# Altium PCB MacroUzaz_PCB.PcbDoc
Units mm, origin at the board's own origin, x right, y up, seen from the top; angles counter-clockwise.
Board outline 70.01 x 100.01 mm, 2 copper layers (Top Layer, Bottom Layer), stack 1.571 mm thick; 21 components, 25 nets, 105 pads, 2 vias.
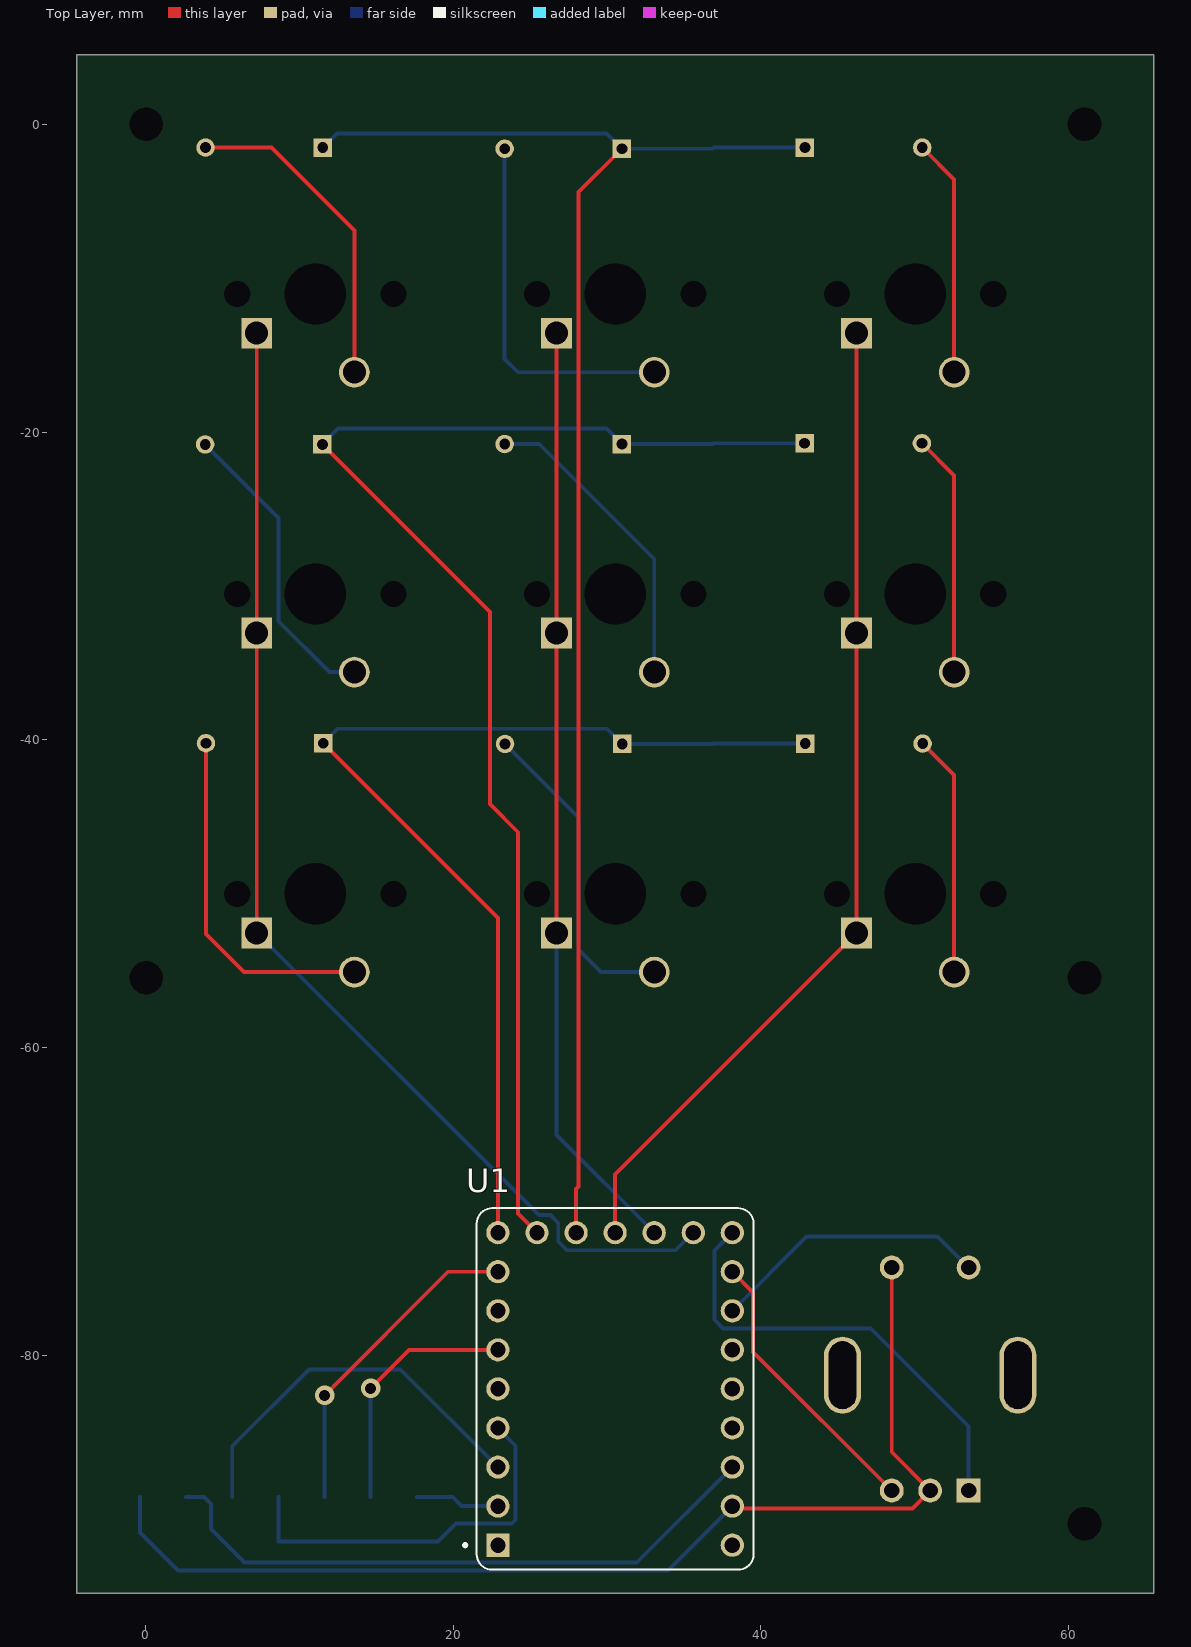
[diagram p0: Top Layer view]
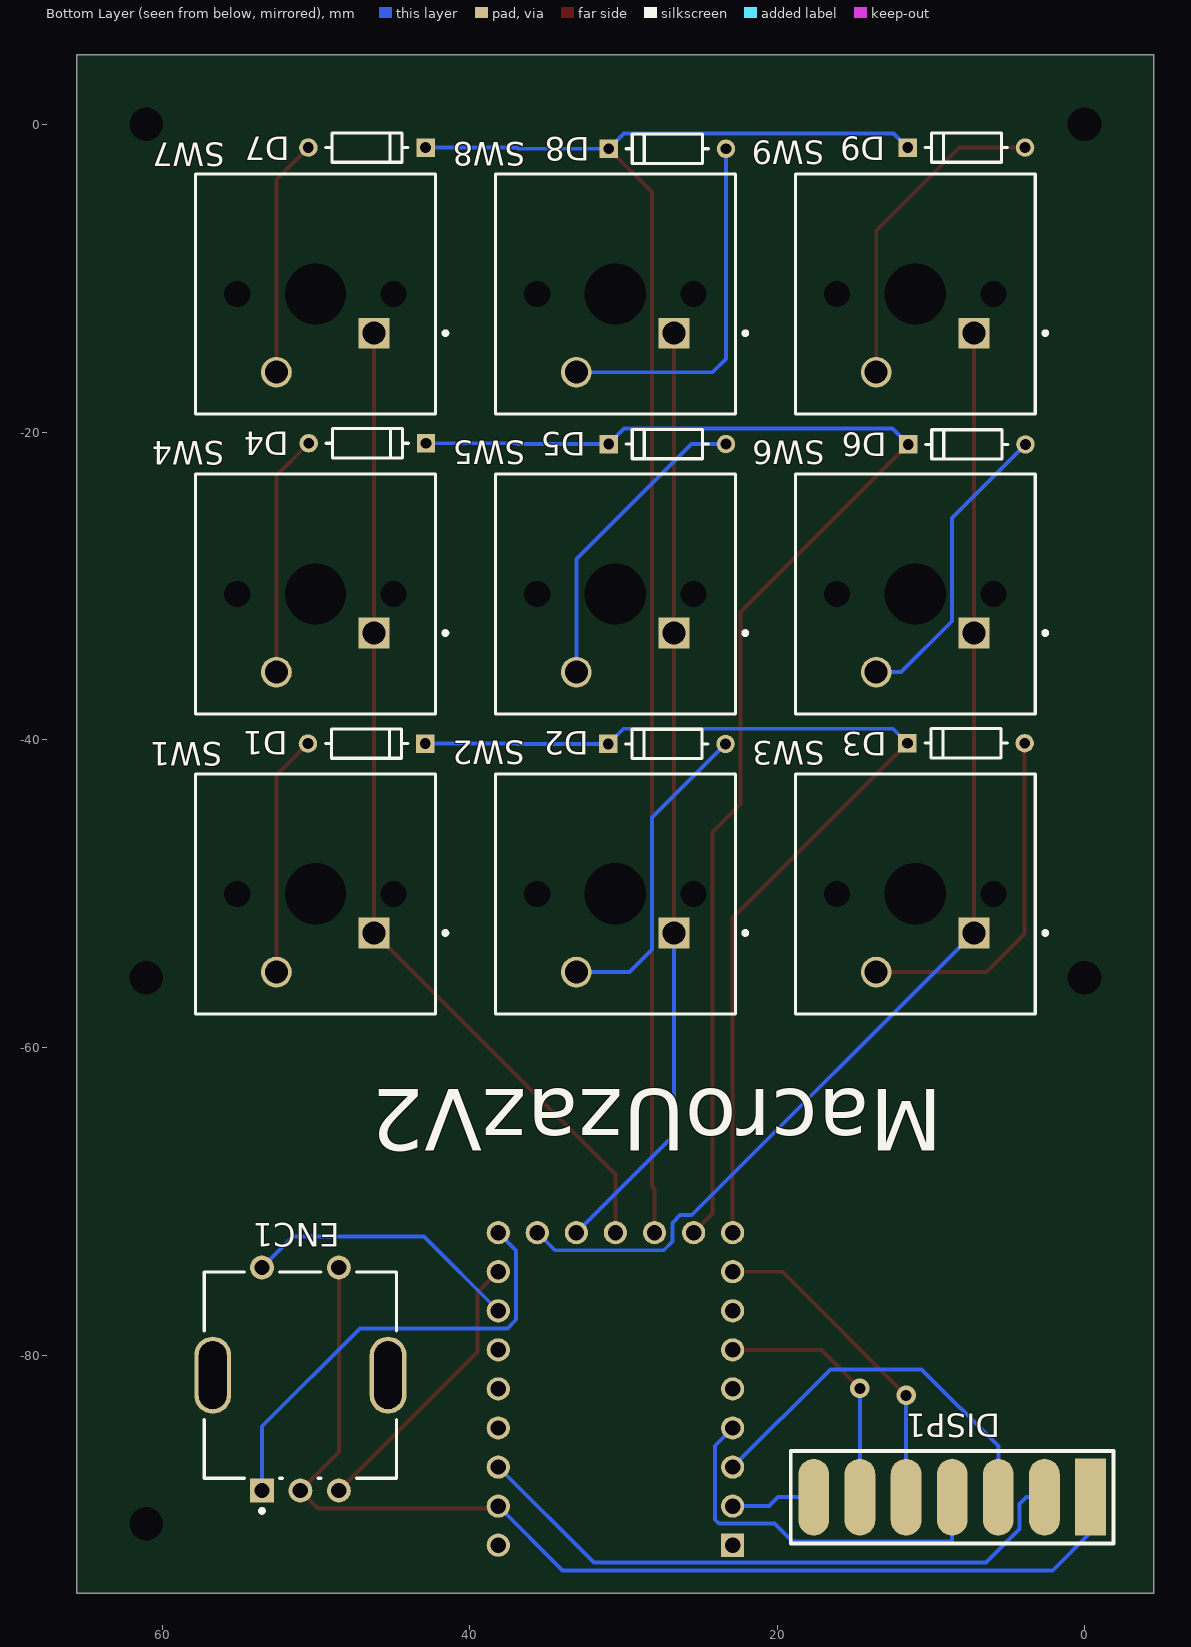
[diagram p1: Bottom Layer view, seen from below]
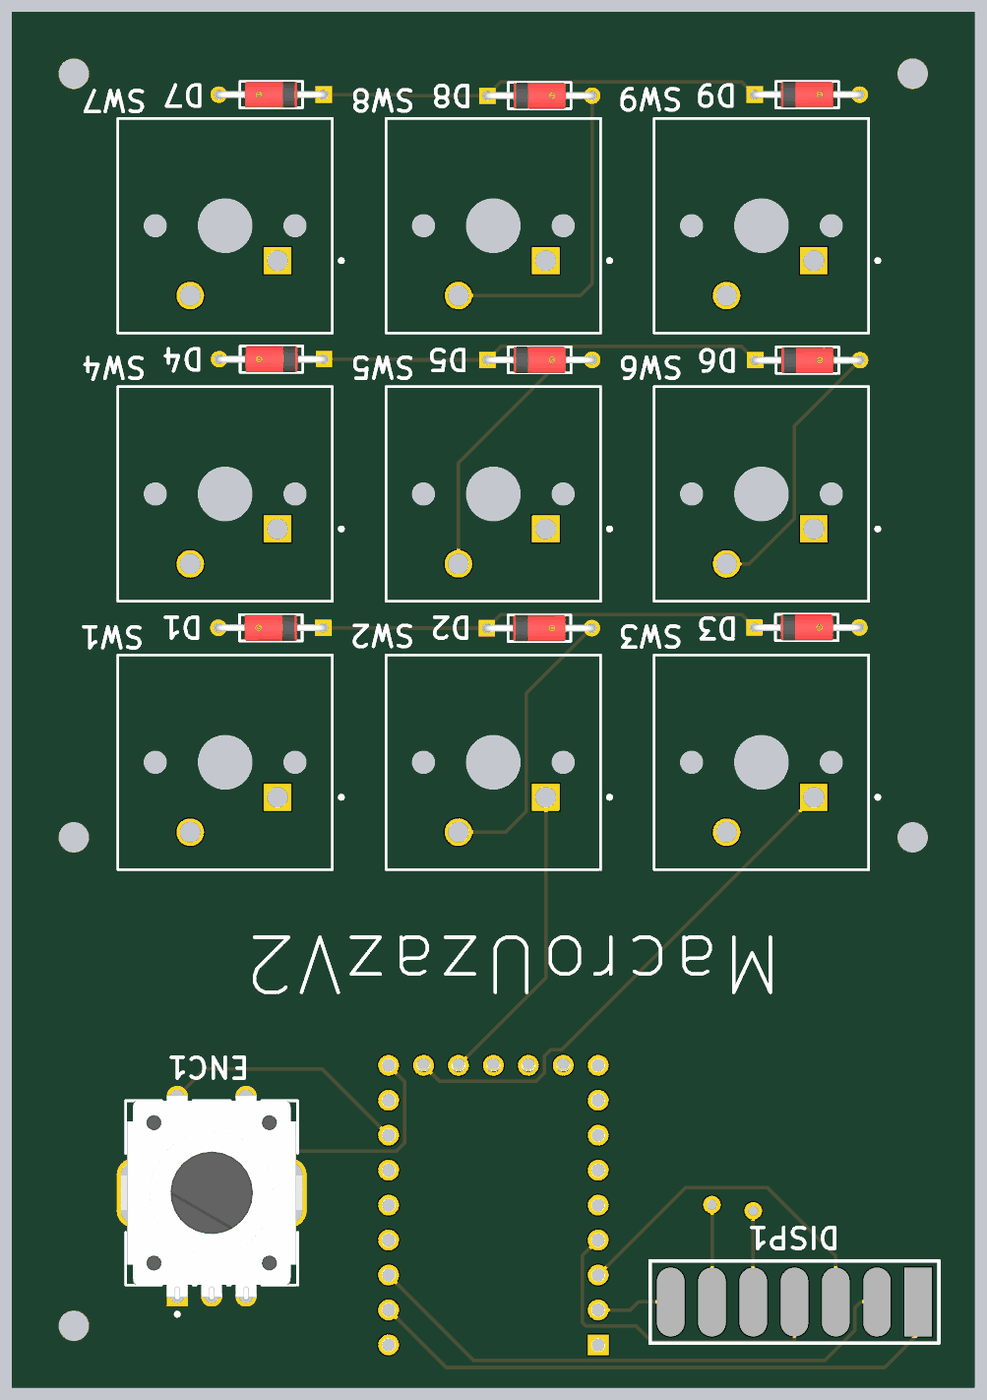
[diagram p2: 3D render of the assembled board from below, using the file's embedded part models]

## Layer stack, top to bottom
Top Solder: solder mask 0.0102, Solder Resist, Dk 3.5
Top Layer: signal copper 0.0356
Dielectric 1: dielectric 1.5, FR-4, Dk 4.8
Bottom Layer: signal copper 0.0356
Bottom Solder: solder mask 0.0102, Solder Resist, Dk 3.5

## Board outline
-4.466,-95.479 65.534,-95.479 65.541,-95.472 65.541,4.528 65.534,4.534 -4.466,4.534 -4.473,4.528

## Design rules (kind name [scope] priority, off if disabled: settings)
Clearance [All] p1: gap=0.254 ignorepadtopadclearanceinfootprint=FALSE
HoleSize [All] p1: absolutevalues=TRUE maxlimit=4.5 minlimit=0.025 maxpercent=80.000 minpercent=20.000
PolygonConnect [All] p1: connectstyle=Relief reliefconductorwidth=0.254 reliefentries=4 polygonreliefangle="90 Angle" airgapwidth=0.254
RoutingVias [All] p1: holewidth=0.711 width=1.27 viastyle="Through Hole" minholewidth=0.711 minwidth=1.27 maxholewidth=0.711 maxwidth=1.27
SolderMaskExpansion [All] p1: expansion=0.102 istentingtop=FALSE
SupplyNets "Schematic Supply Nets_1" [InNet('VCC')] p1: voltage=0.000
SupplyNets "Schematic Supply Nets" [InNet('GND')] p2: voltage=0.000
Width [All] p1: maxlimit=0.254 minlimit=0.254 preferedwidth=0.254
29 further rules are at their usual default settings.

## Components (designator, comment, footprint, x,y, rotation, side; value= is the part's Value field where it differs from the comment)
D1 "1N4148" FP-017AG-MFG 46.704,-40.243 r0 bottom locked
D2 "1N4148" FP-017AG-MFG 27.179,-40.268 r180 bottom locked
D3 "1N4148" FP-017AG-MFG 7.729,-40.218 r180 bottom locked
D4 "1N4148" FP-017AG-MFG 46.654,-20.718 r0 bottom locked
D5 "1N4148" FP-017AG-MFG 27.154,-20.768 r180 bottom
D6 "1N4148" FP-017AG-MFG 7.679,-20.793 r180 bottom locked
D7 "1N4148" FP-017AG-MFG 46.679,-1.493 r0 bottom locked
D8 "1N4148" FP-017AG-MFG 27.154,-1.568 r180 bottom locked
D9 "1N4148" FP-017AG-MFG 7.704,-1.493 r180 bottom locked
DISP1 "1.3\" OLED Display" OLED_Display -0.371,-89.243 r0 top locked
ENC1 "PEC11R-4215F-S0024" FP-PEC11R-4215F-S0024-MFG 51.008,-81.31 r180 bottom locked
SW1 "MX1A-11NW" CHRY-MX1A-11NW_V 50.029,-50.018 r0 bottom locked
SW2 "MX1A-11NW" CHRY-MX1A-11NW_V 30.529,-50.018 r0 bottom locked
SW3 "MX1A-11NW" CHRY-MX1A-11NW_V 11.029,-50.018 r0 bottom locked
SW4 "MX1A-11NW" CHRY-MX1A-11NW_V 50.029,-30.518 r0 bottom locked
SW5 "MX1A-11NW" CHRY-MX1A-11NW_V 30.529,-30.518 r0 bottom locked
SW6 "MX1A-11NW" CHRY-MX1A-11NW_V 11.029,-30.518 r0 bottom locked
SW7 "MX1A-11NW" CHRY-MX1A-11NW_V 50.029,-11.018 r0 bottom locked
SW8 "MX1A-11NW" CHRY-MX1A-11NW_V 30.529,-11.018 r0 bottom locked
SW9 "MX1A-11NW" CHRY-MX1A-11NW_V 11.029,-11.018 r0 bottom locked
U1 "RP2040-ZERO" MODULE_RP2040-ZERO 30.524,-82.203 r180 top locked

## Footprints (in the part's own frame and the unit in brackets; to place one, negate y for a bottom-side part, rotate by r counter-clockwise, add the part's x,y. Pads: shape width x height; smd on the part's side, far side on the other; paste and mask are expansions set on the pad)
CHRY-MX1A-11NW_V [mm] "THD, 2-Leads, Body 15.6x15.6mm"
  rect 2x2 hole 1.499 paste-2539.97: 1(-3.81,2.54)
  round 2 hole 1.499 paste-2539.97: 2(2.54,5.08)
  round 0 hole 3.988 unplated paste-2539.97: MH1(0,0)
  round 0 hole 1.702 unplated paste-2539.97: MH2(-5.08,0) MH3(5.08,0)
  silkscreen extent -8.57,-7.8 7.8,7.8, body extent -7.8,-7.8 7.8,7.8, height 15.2
FP-017AG-MFG [mm]
  rect 1.2x1.2 hole 0.7 paste-2539.97 mask+0: 1(-3.813,0)
  round 1.2 hole 0.7 paste-2539.97 mask+0: 2(3.813,0)
  silkscreen extent -2.68,-0.95 2.68,0.95, body extent -4.06,-0.95 4.06,0.95, height 1.91
FP-PEC11R-4215F-S0024-MFG [mm]
  round 1.55 hole 1 paste-2539.97 mask+0: 1(-2.5,7) 2(2.5,7) B(2.5,-7.5) C(0,-7.5)
  rrect100% 2.4x5 hole 4.4 slot 1.8 at 0 deg paste-2539.97 mask+0: 3(-5.7,0) 4(5.7,0)
  rect 1.55x1.55 hole 1 paste-2539.97 mask+0: A(-2.5,-7.5)
  silkscreen extent -6.25,-8.95 6.25,6.7, body extent -6.9,-7.8 6.9,7.12, height 21.5
MODULE_RP2040-ZERO [mm]
  rect 1.508x1.508 / inner round 1.508 / far side rect 1.508x1.508 hole 1: 1(7.62,10.16)
  round 1.508 hole 1: 2(7.62,7.62) 3(7.62,5.08) 4(7.62,2.54) 5(7.62,0) 6(7.62,-2.54) 7(7.62,-5.08) 8(7.62,-7.62) 9(7.62,-10.16) 10(5.08,-10.16) 11(2.54,-10.16) 12(0,-10.16) 13(-2.54,-10.16) 14(-5.08,-10.16) 15(-7.62,-10.16) 16(-7.62,-7.62) 17(-7.62,-5.08) 18(-7.62,-2.54) 19(-7.62,0) 20(-7.62,2.54) 21(-7.62,5.08) 22(-7.62,7.62) 23(-7.62,10.16)
  silkscreen extent -9,-11.75 9.85,11.75, body extent -9,-11.75 9,12.95, height 4.35
OLED_Display [mm]
  rect 2x5 smd far side: 0(0,0)
  oval 2x5 smd far side: 1(3,0) 2(6,0) 3(9,0) 4(12,0) 5(15,0) 6(18,0)

## Part data
D1 D2 D3 D4 D5 D6 D7 D8 D9: library part CMP-07163-000046-1, "DIODE GEN PURP 100V 200MA DO35", Average Rectified Current=200mA, Capacitance=4pF, Case/Package=DO-35, Current=4A, Forward Current=300mA, Forward Voltage=1V, Max Forward Surge Current (Ifsm)=1A, Max Operating Temperature=175°C, Max Power Dissipation=500mW, Max Repetitive Reverse Voltage (Vrrm)=100V, Max Reverse Current=5uA, Min Operating Temperature=-65°C, Package Quantity=2000, Contact Plating=Tin, Current Rating=200mA, Diameter=1.91mm, Element Configuration=Single, Height=4.56mm, Lead Free="Lead Free", Length=4.56mm, Max Reverse Voltage (DC)=100V, Max Surge Current=4A, Mount="Through Hole", Number of Pins=2, Output Current=200mA, Outside Diameter=1.85mm, Packaging=Bulk, Peak Non-Repetitive Surge Current=4A, Polarity=Standard, Power Dissipation=500mW, Radiation Hardening=No, REACH SVHC="No SVHC", Recovery Time=4ns, Reverse Recovery Time=4ns, Reverse Voltage=100V, Series=-, Voltage=100V, Voltage Rating (DC)=100V, Weight=0.01lb, Width=1.91mm
DISP1: library part OLED_Connector
ENC1: library part CMP-1747-00012-2, "ROTARY ENCODER MECHANICAL 24PPR", Max Operating Temperature=70°C, Min Operating Temperature=-30°C, Package Quantity=150, Built in Switch=Yes, Detent=Yes, Encoder Type=Mechanical, Height=13.4mm, Hole Diameter=1.8mm, Length=21.5mm, Mount="Through Hole", Number of Channels=2, Orientation=Vertical, Output Type=Quadrature, Packaging=Bulk, Pulses per Revolution=24, Radiation Hardening=No, REACH SVHC="No SVHC", RoHS Compliant=Yes, Series=PEC11R, Termination="PC Pins", Type=Mechanical, Width=12.5mm
SW1 SW2 SW3 SW4 SW5 SW6 SW7 SW8 SW9: library part CMP-2000-06786-1, "Keylock Switch, 12 V, -10 to 70 degC, 2-Pin THD, RoHS, Bulk", Actuator Color=N/A, Illumination Color=N/R, Manufacturer=Cherry, Maximum AC Voltage Rating=12V, Maximum Contact Resistance=200mOhm, Maximum Current Rating=0.01A, Minimum Insulation Resistance=100MOhm, Operating Force=0.58N, Operating Temperature=-10to70C, Package Description="2-Pin Through Hole Device, Body 15.6 x 15.6 mm", Part No=MX1A11NW, Actuator Length=3.6mm, Actuator Material=N/A, Actuator Style=Button, Body Orientation=Straight, Contact Material=Silver/Gold, Contact Plating=N/A, COO=UK, Datasheet URL=https://cdn.sparkfun.com/datasheets/Components/Switches/MX%20Series.pdf, Datasheet Version=09/2000, Dielectric Strength=N/A, Dimension=15.6x15.6x15.2mm, ECCN=EAR99, Electrical Life=50000000Cycle, Family=MX, Housing Material=N/A, HTS=8536509065, Illumination Type=N/R, IP Rating=N/A, Manufacturer URL=http://cherryswitches.com/cn/, Maximum DC Voltage Rating=12V, Maximum Power Rating=N/A, Mechanical Life=N/A, Mounting=ThroughHole, Mounting Technology=ThroughHole, Number of Terminals=2, Operating Speed=N/A, Package Reference=MX1A-11NW, Packaging=N/A, Pole Throw Configuration=SPST, RoHS=Unknown, Row Spacing=6.35mm, Supplier=CherryElectrical, Switch Configuration=N.O., Terminal Pitch=2.54mm, Terminal Type=PCPins, Total Travel=4.06mm, Type=DesktopProfile
U1: library part CMP-003-000000-1, "Low-Cost, High-Performance Pico-Like MCU Board Based On Raspberry Pi Microcontroller RP2040", Package=Package, Check_prices=https://www.snapeda.com/parts/RP2040-ZERO/Waveshare+Electronics/view-part/?ref=eda, Component Type=Standard, Design Item ID=RP2040-ZERO, MF="Waveshare Electronics", MP=RP2040-ZERO, Pin Count=23, SnapEDA_Link=https://www.snapeda.com/parts/RP2040-ZERO/Waveshare+Electronics/view-part/?ref=snap, Source=RP2040-ZERO.SchLib

## Free pads (board coordinates)
  round 0 hole 2.2: 1(0.034,0.028) 2(61.034,0.028) 3(61.034,-55.472) 4(61.034,-90.972) 5(0.034,-55.472)

## Via types
v1: diameter 1.27, hole 0.711, Top Layer to Bottom Layer, 2 vias

## Nets (pads, with @x,y where several pads share a name; then routed paths per layer and width w, separated by ;. In a path a pad name is that pad's centre, name@x,y a point inside that pad or via, vN(x,y) a via of type N, cw(c..) or ccw(c..) an arc to the next point about the centre after c; other vN are vias at no path point)
ChannelA: ENC1.A U1.15 | length 29.7
  Bottom Layer w0.254: U1.15 36.985,-73.202 36.985,-77.707 37.544,-78.266 47.145,-78.266 53.508,-84.629 ENC1.A
ChannelB: ENC1.B U1.16 | length 18.5
  Top Layer w0.254: U1.16 39.5,-75.939 39.5,-79.802 ENC1.B
Col1: SW1.1 SW4.1 SW7.1 U1.12 | length 65
  Top Layer w0.254: U1.12 30.524,-68.253 SW1.1 SW4.1 SW7.1
Col2: SW2.1 SW5.1 SW8.1 U1.13 | length 61.1
  Top Layer w0.254: SW2.1 SW5.1 SW8.1
  Bottom Layer w0.254: SW2.1 26.719,-65.698 U1.13
Col3: SW3.1 SW6.1 SW9.1 U1.14 | length 77.1
  Top Layer w0.254: SW3.1 SW6.1 SW9.1
  Bottom Layer w0.254: SW3.1 25.561,-70.9 26.317,-70.9 26.825,-71.408 26.825,-72.627 27.384,-73.186 34.461,-73.186 U1.14
CS: DISP1.6 U1.2 | length 5.5
  Bottom Layer w0.254: DISP1.6 19.967,-89.243 20.547,-89.823 U1.2
DC: DISP1.5 U1.6 | length 16.4
  Top Layer w0.254: v1(14.629,-82.168) 17.134,-79.663 U1.6
  Bottom Layer w0.254: DISP1.5 v1(14.629,-82.168)
GND: DISP1.0 ENC1.2 ENC1.C U1.22 | length 72.5
  Top Layer w0.254: U1.22 38.287,-89.966 49.852,-89.966 ENC1.C 48.508,-86.31 ENC1.2
  Bottom Layer w0.254: DISP1.0 -0.371,-91.544 2.091,-94.006 33.961,-94.006 U1.22
MOSI: DISP1.3 U1.4 | length 25.4
  Bottom Layer w0.254: DISP1.3 8.629,-92.134 19.002,-92.134 20.17,-90.966 23.803,-90.966 24.057,-90.712 24.057,-85.896 U1.4
NetD1_2: D1.2 SW1.2 | length 15.7
  Top Layer w0.254: D1.2 52.569,-42.295 SW1.2
NetD2_2: D2.2 SW2.2 | length 20.9
  Bottom Layer w0.254: D2.2 28.146,-45.048 28.146,-53.628 29.616,-55.098 SW2.2
NetD3_2: D3.2 SW3.2 | length 23.1
  Top Layer w0.254: D3.2 3.916,-52.613 6.4,-55.098 SW3.2
NetD4_2: D4.2 SW4.2 | length 15.8
  Top Layer w0.254: D4.2 52.569,-22.82 SW4.2
NetD5_2: D5.2 SW5.2 | length 20.2
  Bottom Layer w0.254: D5.2 25.588,-20.768 33.069,-28.249 SW5.2
NetD6_2: D6.2 SW6.2 | length 19.8
  Bottom Layer w0.254: D6.2 8.639,-25.566 8.639,-32.292 11.945,-35.598 SW6.2
NetD7_2: D7.2 SW7.2 | length 15.5
  Top Layer w0.254: D7.2 52.569,-3.57 SW7.2
NetD8_2: D8.2 SW8.2 | length 23.7
  Bottom Layer w0.254: D8.2 23.341,-15.23 24.209,-16.098 SW8.2
NetD9_2: D9.2 SW9.2 | length 21.1
  Top Layer w0.254: D9.2 8.17,-1.493 13.569,-6.892 SW9.2
RES: DISP1.4 U1.8 | length 21.2
  Top Layer w0.254: v1(11.629,-82.618) 19.664,-74.583 U1.8
  Bottom Layer w0.254: DISP1.4 v1(11.629,-82.618)
Row1: D1.1 D2.1 D3.1 U1.9 | length 68.7
  Top Layer w0.254: D3.1 22.904,-51.58 U1.9
  Bottom Layer w0.254: D3.1 12.483,-39.277 30.001,-39.277 D2.1 36.909,-40.268 36.934,-40.243 D1.1
Row2: D4.1 D5.1 D6.1 U1.10 | length 89.2
  Top Layer w0.254: D6.1 22.38,-31.681 22.38,-44.179 24.209,-46.008 24.209,-70.808 U1.10
  Bottom Layer w0.254: D6.1 12.515,-19.77 29.969,-19.77 D5.1 36.858,-20.768 36.908,-20.718 D4.1
Row3: D7.1 D8.1 D9.1 U1.11 | length 103.9
  Top Layer w0.254: U1.11 27.984,-69.208 28.146,-69.046 28.146,-4.389 D8.1
  Bottom Layer w0.254: D9.1 12.442,-0.567 29.966,-0.567 D8.1 36.858,-1.568 36.933,-1.493 D7.1
SCK: DISP1.2 U1.3 | length 25.3
  Bottom Layer w0.254: DISP1.2 5.629,-85.924 10.62,-80.933 16.554,-80.933 U1.3
SW1: ENC1.1 U1.17 | length 18.2
  Bottom Layer w0.254: U1.17 42.974,-72.293 51.491,-72.293 ENC1.1
VCC: DISP1.1 U1.21 | length 40.8
  Bottom Layer w0.254: DISP1.1 3.795,-89.243 4.248,-89.696 4.248,-91.315 6.431,-93.498 31.929,-93.498 U1.21
pads on no net: ENC1.3 ENC1.4 SW1.MH1 SW1.MH2 SW1.MH3 SW2.MH1 SW2.MH2 SW2.MH3 SW3.MH1 SW3.MH2 SW3.MH3 SW4.MH1 SW4.MH2 SW4.MH3 SW5.MH1 SW5.MH2 SW5.MH3 SW6.MH1 SW6.MH2 SW6.MH3 SW7.MH1 SW7.MH2 SW7.MH3 SW8.MH1 SW8.MH2 SW8.MH3 SW9.MH1 SW9.MH2 SW9.MH3 U1.1 U1.5 U1.7 U1.18 U1.19 U1.20 U1.23

## Silkscreen, mask and mechanical layers (free items; w line width, h text height)
Bottom Overlay:
  text "MacroUzazV2" at 9.258,-62.722 h4 r180
Mechanical 1:
  drawing of 594 lines, arcs and shapes, not listed
  text "24" at -235.765,132.849 h1.98
  text "23" at -215.89,132.849 h1.98
  text "22" at -190.89,132.849 h1.98
  text "21" at -165.89,132.849 h1.98
  text "20" at -140.89,132.849 h1.98
  text "19" at -115.89,132.849 h1.98
  text "18" at -90.89,132.849 h1.98
  text "17" at -65.89,132.849 h1.98
  text "16" at -40.89,132.849 h1.98
  text "15" at -15.89,132.849 h1.98
  text "14" at 9.11,132.849 h1.98
  text "13" at 34.11,132.849 h1.98
  text "12" at 59.11,132.849 h1.98
  text "11" at 84.11,132.849 h1.98
  text "10" at 109.11,132.849 h1.98
  text "9" at 134.13,132.849 h1.98
  text "8" at 159.13,132.849 h1.98
  text "7" at 184.13,132.849 h1.98
  text "6" at 209.13,132.849 h1.98
  text "5" at 234.13,132.849 h1.98
  text "4" at 259.13,132.849 h1.98
  text "3" at 284.13,132.849 h1.98
  text "2" at 309.13,132.849 h1.98
  text "1" at 329.005,132.849 h1.98
  text "T" at -244.356,116.474 h1.98
  text "T" at 337.644,116.474 h1.98
  text "R" at -244.378,88.849 h1.98
  text "R" at 337.622,88.849 h1.98
  text "P" at -244.358,63.849 h1.98
  text "P" at 337.642,63.849 h1.98
  text "N" at -244.368,38.849 h1.98
  text "N" at 337.632,38.849 h1.98
  text "M" at -244.419,13.849 h1.98
  text "M" at 337.581,13.849 h1.98
  text "L" at -244.373,-11.151 h1.98
  text "L" at 337.627,-11.151 h1.98
  text "K" at -244.356,-36.151 h1.98
  text "K" at 337.644,-36.151 h1.98
  text "J" at -244.367,-61.151 h1.98
  text "J" at 337.633,-61.151 h1.98
  text "H" at -244.355,-86.151 h1.98
  text "H" at 337.645,-86.151 h1.98
  text "G" at -244.357,-111.151 h1.98
  text "G" at 337.643,-111.151 h1.98
  text "F" at -244.371,-136.151 h1.98
  text "F" at 337.629,-136.151 h1.98
  text "E" at -244.346,-161.151 h1.98
  text "E" at 337.654,-161.151 h1.98
  text "D" at -244.374,-186.151 h1.98
  text "D" at 337.626,-186.151 h1.98
  text "C" at -244.371,-211.151 h1.98
  text "C" at 337.629,-211.151 h1.98
  text "B" at -244.365,-236.151 h1.98
  text "B" at 337.635,-236.151 h1.98
  text "DEBURR AND  / BREAK SHARP  / EDGES" at 287.055,-252.898 h0.75
  text "UNLESS OTHERWISE SPECIFIED: / DIMENSIONS ARE IN MILLIMETERS / SURFACE FINISH: / TOLERANCES: /    LINEAR: /    ANGULAR:" at 246.697,-252.94 h0.75
  text "FINISH:" at 263.586,-252.94 h0.75
  text "DO NOT SCALE DRAWING" at 302.707,-253.634 h0.75
  text "REVISION" at 323.064,-253.733 h0.75
  text "DATE" at 270.007,-261.612 h0.75
  text "TITLE:" at 296.445,-261.612 h0.75
  text "SIGNATURE" at 261.417,-261.619 h0.75
  text "NAME" at 253.561,-261.649 h0.75
  text "DRAWN" at 246.722,-263.708 h0.75
  text "A" at -244.43,-263.804 h1.98
  text "A" at 337.57,-263.804 h1.98
  text "SOLIDWORKS Educational Product." at -253.1,-264.611 h7.27
  text "CHK'D" at 246.87,-265.819 h0.75
  text "APPV'D" at 246.601,-267.867 h0.75
  text "MFG" at 246.962,-270.042 h0.75
  text "MATERIAL:" at 274.223,-271.907 h0.75
  text "DWG NO." at 296.376,-271.907 h0.75
  text "Q.A" at 247.155,-272.148 h0.75
  text "A0" at 331.836,-272.697 h1.46
  text "PCBv1" at 313.844,-273.097 h3.17
  text "For Instructional Use Only." at -253.1,-275.522 h7.27
  text "WEIGHT:" at 274.209,-278.425 h0.75
  text "SCALE:2:1" at 296.437,-278.45 h0.75
  text "SHEET 1 OF 1" at 318.639,-278.45 h0.75
  text "24" at -235.765,-280.179 h1.98
  text "23" at -215.89,-280.179 h1.98
  text "22" at -190.89,-280.179 h1.98
  text "21" at -165.89,-280.179 h1.98
  text "20" at -140.89,-280.179 h1.98
  text "19" at -115.89,-280.179 h1.98
  text "18" at -90.89,-280.179 h1.98
  text "17" at -65.89,-280.179 h1.98
  text "16" at -40.89,-280.179 h1.98
  text "15" at -15.89,-280.179 h1.98
  text "14" at 9.11,-280.179 h1.98
  text "13" at 34.11,-280.179 h1.98
  text "12" at 59.11,-280.179 h1.98
  text "11" at 84.11,-280.179 h1.98
  text "10" at 109.11,-280.179 h1.98
  text "9" at 134.13,-280.179 h1.98
  text "8" at 159.13,-280.179 h1.98
  text "7" at 184.13,-280.179 h1.98
  text "6" at 209.13,-280.179 h1.98
  text "5" at 234.13,-280.179 h1.98
  text "4" at 259.13,-280.179 h1.98
  text "3" at 284.13,-280.179 h1.98
  text "2" at 309.13,-280.179 h1.98
  text "1" at 329.005,-280.179 h1.98
Top 3D Body:
  lines w0.254: 45.893,-81.31 56.123,-81.31 ; 48.958,-74.11 53.058,-74.11 ; 51.008,-88.21 51.008,-74.11